# EAGLE board FeedAssembly_v1 (EAGLE 7.5.0)
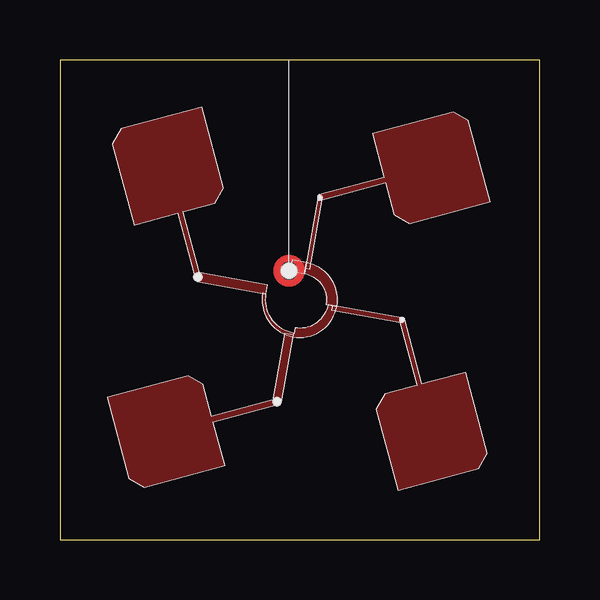
[diagram p0: board, top side]
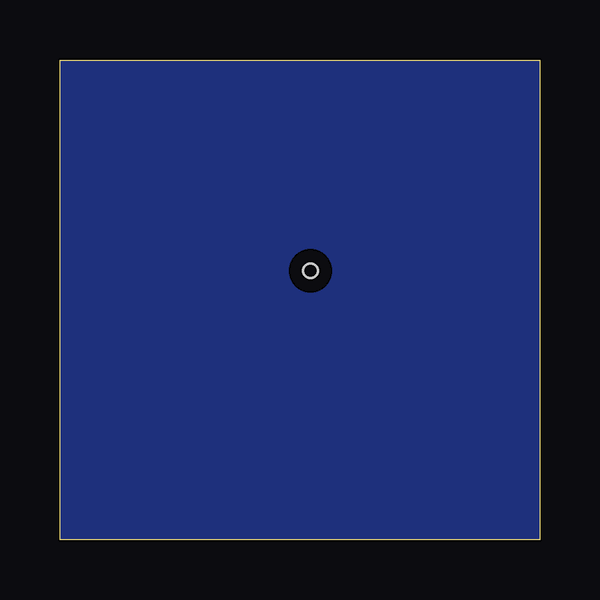
[diagram p1: board, bottom side, seen from below]

Size 20 x 20 mm. Coordinates in mm from the lower left corner, seen from the top.
Outline: 0,0 20,0 20,20 0,20 0,0
Copper layers (1*2*16): Top 0.035mm / dielectric 1.5mm / Route2 0.035mm / dielectric 0.15mm / Bottom 0.035mm
Design rules "default *": minimum track width 10mil, minimum drill 24mil, track to track 0mil, track to pad 0mil, pad to pad 0mil, via to via 0mil, smd to smd 0mil, copper to edge 0mil, drill to drill 0mil, minimum pad ring 10mil, minimum via ring 8mil, stop-mask expansion 4mil, vias tented up to drill 0mil, thermal gap 10mil

## Footprints (pad centres in the part's own frame; a part is rotated, then mirrored left to right if it is on the bottom)
THROUGH-HOL_RF_CONNECTION = hole 0.6: 0,0

## Placement (x,y rotation side)
E$1  [THROUGH-HOL_RF_CONNECTION]  9.55,11.21 0 top

## Library data of the parts
E$1 = mmComponents

## Tracks (layer width: path | path; a pad name or v marks a point on that pad's centre or on a via)
S$2
  pour Top (no thermals): 8.5,10.3 8.45,10.27 8.45,10.22 8.44,10.17 8.43,10.1 8.43,10.05 8.43,9.99 8.43,9.91 8.44,9.84 8.44,9.8 8.45,9.75 8.46,9.66 8.48,9.6 8.5,9.55 8.51,9.51 8.54,9.41 8.58,9.32 8.61,9.27 8.64,9.21 8.68,9.15 8.71,9.11 8.73,9.07 8.77,9.02 8.8,8.98 8.85,8.94 8.88,8.9 8.92,8.86 9.01,8.78 9.09,8.72 9.16,8.68 9.24,8.63 9.3,8.59 9.36,8.56 9.47,8.52 9.73,8.45 9.84,8.44 9.9,8.43 9.96,8.43 10.02,8.43 10.08,8.43 10.13,8.43 10.22,8.44 10.3,8.46 10.36,8.47 10.46,8.5 10.54,8.52 10.6,8.55 10.66,8.57 10.71,8.6 10.78,8.64 10.84,8.67 10.91,8.72 10.96,8.76 11.01,8.8 11.06,8.84 11.11,8.89 11.14,8.92 11.21,9 11.26,9.06 11.3,9.11 11.35,9.2 11.4,9.29 11.43,9.36 11.48,9.46 11.5,9.54 11.18,9.83 11.17,9.79 11.16,9.75 11.15,9.7 11.13,9.62 11.12,9.58 11.09,9.53 11.07,9.47 11.03,9.4 10.98,9.33 10.93,9.26 10.89,9.21 10.84,9.16 10.8,9.12 10.75,9.07 10.68,9.02 10.62,8.98 10.56,8.95 10.5,8.92 10.45,8.89 10.39,8.87 10.33,8.86 10.26,8.84 10.19,8.82 10.12,8.81 10.04,8.81 9.97,8.81 9.9,8.81 9.84,8.82 9.79,8.83 9.75,8.6 9.7,8.61 9.6,8.63 9.53,8.66 9.47,8.68 9.43,8.7 9.36,8.73 9.3,8.76 9.23,8.81 9.17,8.85 9.12,8.89 9.03,8.96 8.98,9.01 8.91,9.09 8.86,9.15 8.81,9.22 8.76,9.3 8.71,9.4 8.68,9.48 8.64,9.58 8.62,9.68 8.6,9.77 8.59,9.85 8.58,9.91 8.58,9.96 8.58,10.03 8.58,10.1 8.59,10.19 8.6,10.25
S$6
  pour Top: 10.23,11.32 10.42,11.29 10.94,14.25 10.76,14.28
S$7
  pour Top: 11.36,9.76 11.33,9.57 14.25,9.06 14.28,9.24
S$8
  pour Top: 9.74,8.53 9.37,8.59 8.87,5.78 9.24,5.72
S$9
  pour Top: 8.6,10.25 8.67,10.62 5.78,11.13 5.72,10.76
S$10
  pour Top: 10.27,11.55 9.68,11.65 9.77,11.55 9.96,11.47 9.96,11.09 10.19,11.09
S$11
  pour Top: 13.03,16.93 13.52,15.1 10.82,14.38 10.88,14.15 13.58,14.88 13.93,13.55 14.57,13.19 17.94,14.09 17.04,17.46 16.4,17.83
S$12
  pour Top: 16.93,6.97 15.1,6.48 14.38,9.18 14.15,9.12 14.88,6.42 13.55,6.07 13.19,5.43 14.09,2.06 17.46,2.96 17.83,3.6
S$13
  pour Top: 6.88,3.09 6.39,4.91 9.09,5.64 9.03,5.86 6.33,5.14 5.98,6.46 5.34,6.83 1.96,5.93 2.87,2.55 3.51,2.19
S$14
  pour Top: 3.09,13.12 4.91,13.61 5.64,10.91 5.86,10.97 5.14,13.67 6.46,14.02 6.83,14.66 5.93,18.04 2.55,17.13 2.19,16.49
S$15
  pour Bottom: 20,0 20,20 9.55,20 0,20 0,0
S$16
  pour Top: 11.3,9.6 11.2,9.7 11.2,9.8 11.17,9.79 11.1,9.81 11.11,9.89 11.11,9.95 11.11,10.02 11.11,10.07 11.11,10.12 11.1,10.16 11.09,10.22 11.09,10.24 11.07,10.3 11.05,10.37 11.01,10.47 10.97,10.54 10.93,10.6 10.9,10.66 10.86,10.7 10.82,10.75 10.78,10.79 10.74,10.83 10.69,10.87 10.64,10.9 10.6,10.94 10.54,10.97 10.49,10.99 10.44,11.02 10.38,11.04 10.34,11.06 10.29,11.07 10.25,11.08 10.19,11.1 10,11.6 10.11,11.58 10.21,11.56 10.27,11.55 10.46,11.5 10.54,11.48 10.59,11.46 10.64,11.43 10.7,11.41 10.74,11.38 10.8,11.35 10.87,11.31 10.92,11.27 10.99,11.22 11.05,11.17 11.11,11.11 11.14,11.07 11.2,11.01 11.25,10.96 11.27,10.92 11.32,10.86 11.37,10.78 11.41,10.7 11.43,10.64 11.46,10.59 11.48,10.53 11.5,10.47 11.52,10.4 11.54,10.3 11.55,10.24 11.56,10.17 11.57,10.08 11.57,10 11.57,9.94 11.57,9.88 11.56,9.83 11.55,9.77 11.55,9.72
(copper drawn outside any net)
  shapes: Top circle x4